# Allegro board demoa22222222.brd
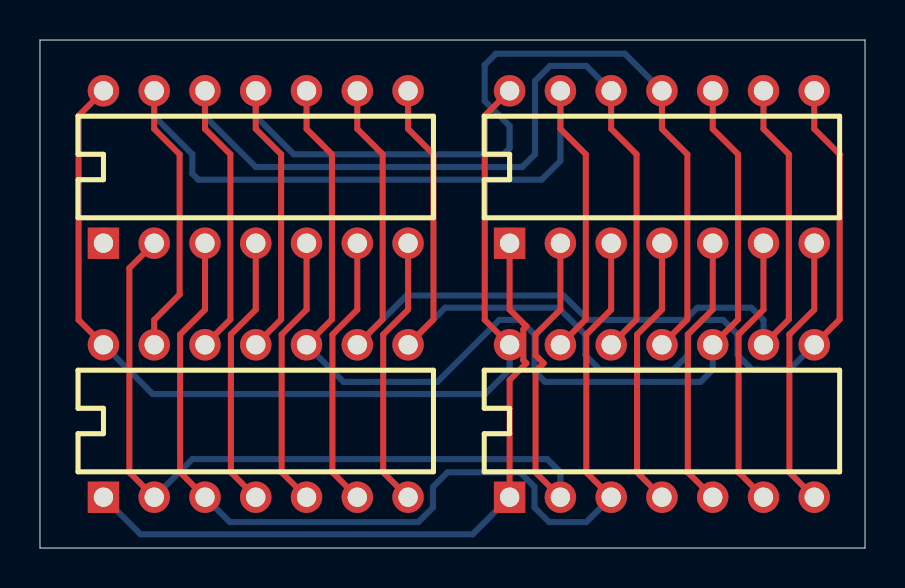
[diagram p0: board, top side]
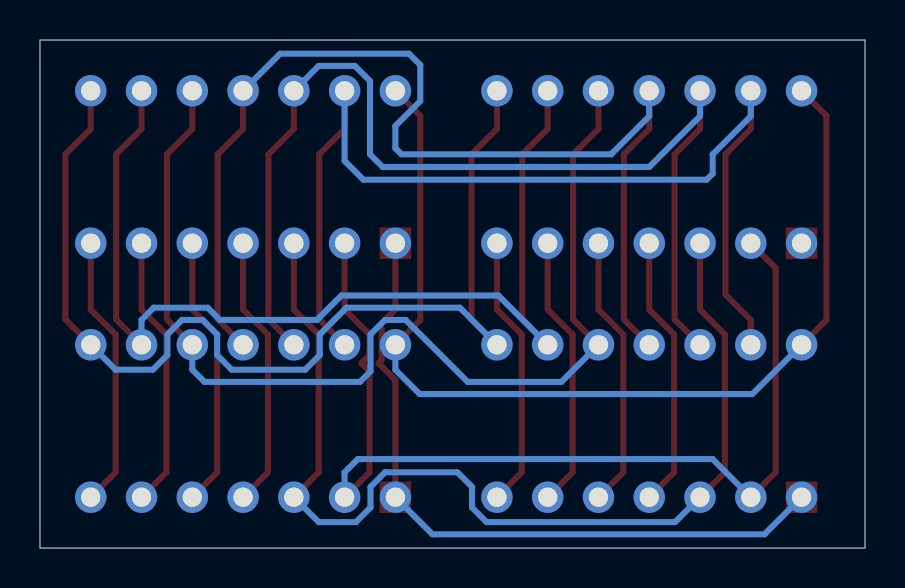
[diagram p1: board, bottom side, seen from below]

Outline 41.27 x 25.4 mm; copper layers: TOP, GND, POWER, INNER1, INNER2, BOTTOM. Coordinates in mm from the lower left corner of the outline.
Outline path: 0,25.4 0,0 41.27,0 41.27,25.4 0,25.4

## Design rules (mm)
nets with their own width: min track width 0.305; nets DAT1 DAT2 DAT3 DAT4 DAT5 DAT6 DAT7 DAT8 DAT9 DAT10 DAT11 DAT12 GND VCC

## Placement (name value [footprint] x y rotation side)
U1  7400  [DIP14]  3.17 15.24 0 top
U2  7400  [DIP14]  23.5 15.24 0 top
U3  7400  [DIP14]  3.17 2.54 0 top
U4  7400  [DIP14]  23.5 2.54 0 top

## Library data of the parts
U1-U4 = 7400

## Footprints (pads in the part's own frame, mm; a bottom-side part is the same pattern mirrored in y, then rotated)
DIP14
  rect 1.575x1.575 hole 0.965: 1(0,0)
  round 1.575 hole 0.965: 2(2.54,0) 3(5.08,0) 4(7.62,0) 5(10.16,0) 6(12.7,0) 7(15.24,0) 8(15.24,7.62) 9(12.7,7.62) 10(10.16,7.62) 11(7.62,7.62) 12(5.08,7.62) 13(2.54,7.62) 14(0,7.62)

## Nets
GND: U1.7(TP-7) U2.7(TP-7) U3.7(TP-7) U4.7(TP-7)
VCC: U1.14(TP-14) U2.14(TP-14) U3.14(TP-14) U4.14(TP-14)
DAT1: U1.2(TP-2) U2.2(TP-2) U3.2(TP-2) U4.2(TP-2)
DAT2: U1.1(TP-1) U2.1(TP-1) U3.1(TP-1) U4.1(TP-1)
DAT3: U1.3(TP-3) U2.3(TP-3) U3.3(TP-3) U4.3(TP-3)
DAT4: U1.5(TP-5) U2.5(TP-5) U3.5(TP-5) U4.5(TP-5)
DAT5: U1.4(TP-4) U2.4(TP-4) U3.4(TP-4) U4.4(TP-4)
DAT6: U1.6(TP-6) U2.6(TP-6) U3.6(TP-6) U4.6(TP-6)
DAT7: U1.10(TP-10) U2.10(TP-10) U3.10(TP-10) U4.10(TP-10)
DAT8: U1.9(TP-9) U2.9(TP-9) U3.9(TP-9) U4.9(TP-9)
DAT9: U1.8(TP-8) U2.8(TP-8) U3.8(TP-8) U4.8(TP-8)
DAT10: U1.13(TP-13) U2.13(TP-13) U3.13(TP-13) U4.13(TP-13)
DAT11: U1.12(TP-12) U2.12(TP-12) U3.12(TP-12) U4.12(TP-12)
DAT12: U1.11(TP-11) U2.11(TP-11) U3.11(TP-11) U4.11(TP-11)

## Routing (per net, layer and track width the routed paths; a pad name or vN(x,y) marks a point on that pad's centre or on a via; arc(x,y) is an arc through that point)
GND: length 27.5
  TOP w0.305: U3.7 17.17,3.78 17.17,10.68 18.42,11.92 U1.7 ; U2.7 38.73,11.92 37.49,10.68 37.49,3.78 U4.7
VCC: length 50.6
  TOP w0.305: U4.14 22.25,11.4 22.25,21.62 U2.14 ; U3.14 1.93,11.4 1.93,21.62 U1.14
  BOTTOM w0.305: U4.14 23.5,8.92 22.28,7.7 5.64,7.7 U3.14
DAT1: length 50.4
  TOP w0.305: U3.2 4.47,3.78 4.47,14 U1.2 ; U2.2 26.04,11.92 24.79,10.68 24.79,9.64 25.2,9.24 24.79,8.83 24.79,3.78 U4.2
  BOTTOM w0.305: U3.2 7.62,4.45 25.37,4.45 26.04,3.78 U4.2
DAT2: length 35.4
  TOP w0.305: U4.1 23.5,8.4 24.33,9.24 24.18,9.39 24.18,10.93 24.33,11.08 23.5,11.92 U2.1
  BOTTOM w0.305: U4.1 21.64,0.69 5.03,0.69 U3.1
DAT3: length 52.1
  TOP w0.305: U1.3 8.26,11.92 7.01,10.68 7.01,3.78 U3.3 ; U4.3 27.33,3.78 27.33,10.68 28.58,11.92 U2.3
  BOTTOM w0.305: U3.3 9.5,1.3 18.93,1.3 19.66,2.02 19.66,3.06 20.39,3.78 24.01,3.78 24.74,3.06 24.74,2.02 25.47,1.3 27.33,1.3 U4.3
DAT4: length 27.5
  TOP w0.305: U4.5 32.41,3.78 32.41,10.68 33.66,11.92 U2.5 ; U3.5 12.09,3.78 12.09,10.68 13.33,11.92 U1.5
DAT5: length 27.5
  TOP w0.305: U3.4 9.55,3.78 9.55,10.68 10.79,11.92 U1.4 ; U4.4 29.87,3.78 29.87,10.68 31.12,11.92 U2.4
DAT6: length 27.5
  TOP w0.305: U3.6 14.63,3.78 14.63,10.68 15.88,11.92 U1.6 ; U2.6 36.2,11.92 34.95,10.68 34.95,3.78 U4.6
DAT7: length 53.7
  TOP w0.305: U3.10 14.61,11.43 14.61,19.68 13.33,20.95 U1.10 ; U4.10 34.92,11.43 34.92,19.68 33.66,20.95 U2.10
  BOTTOM w0.305: U3.10 15.19,8.31 19.88,8.31 22.98,11.4 24.01,11.4 24.74,10.68 24.74,8.83 25.27,8.31 33.05,8.31 33.66,8.92 U4.10
DAT8: length 51.1
  TOP w0.305: U4.9 37.46,11.43 37.46,19.68 36.2,20.95 U2.9 ; U3.9 17.15,11.43 17.15,19.68 15.88,20.95 U1.9
  BOTTOM w0.305: U4.9 36.2,11.4 35.59,12.01 32.89,12.01 32.28,11.4 27.41,11.4 26.2,12.62 18.34,12.62 U3.9
DAT9: length 54.3
  TOP w0.305: U4.8 40,11.43 40,19.68 38.73,20.95 U2.8 ; U1.8 18.42,20.95 19.69,19.68 19.69,11.43 U3.8
  BOTTOM w0.305: U3.8 20.27,12.01 25.94,12.01 27.28,10.68 27.28,9.64 28.01,8.92 31.68,8.92 32.41,9.64 32.41,10.68 33.14,11.4 34.17,11.4 34.9,10.68 34.9,9.64 35.63,8.92 37.49,8.92 U4.8
DAT10: length 54.9
  TOP w0.305: U2.13 26.04,20.95 27.31,19.68 27.31,11.43 U4.13 ; U3.13 5.71,11.4 6.98,12.67 6.98,19.68 5.71,20.95 U1.13
  BOTTOM w0.305: U1.13 5.71,21.59 7.62,19.68 7.62,18.72 7.92,18.41 25.1,18.41 26.04,19.35 U2.13
DAT11: length 54.9
  TOP w0.305: U3.12 9.53,11.43 9.53,19.68 8.26,20.95 U1.12 ; U4.12 29.85,11.43 29.85,19.68 28.58,20.95 U2.12
  BOTTOM w0.305: U1.12 8.26,21.59 10.79,19.05 24.13,19.05 24.77,19.68 24.77,23.35 25.52,24.1 27.33,24.1 U2.12
DAT12: length 56.9
  TOP w0.305: U3.11 12.06,11.43 12.06,19.68 10.79,20.95 U1.11 ; U4.11 32.38,11.43 32.38,19.68 31.12,20.95 U2.11
  BOTTOM w0.305: U1.11 10.79,21.59 12.7,19.68 23.19,19.68 23.5,19.99 23.5,21.1 22.25,22.34 22.25,24.16 22.81,24.71 29.26,24.71 U2.11
